# Altium PCB EL-23 PCB.PcbDoc
Units mil, origin at the board's own origin, x right, y up, seen from the top; angles counter-clockwise.
Board outline 1614.17 x 1122.05 mil, 2 copper layers (Top Layer, Bottom Layer); 7 components, 11 nets, 31 pads, 0 vias.
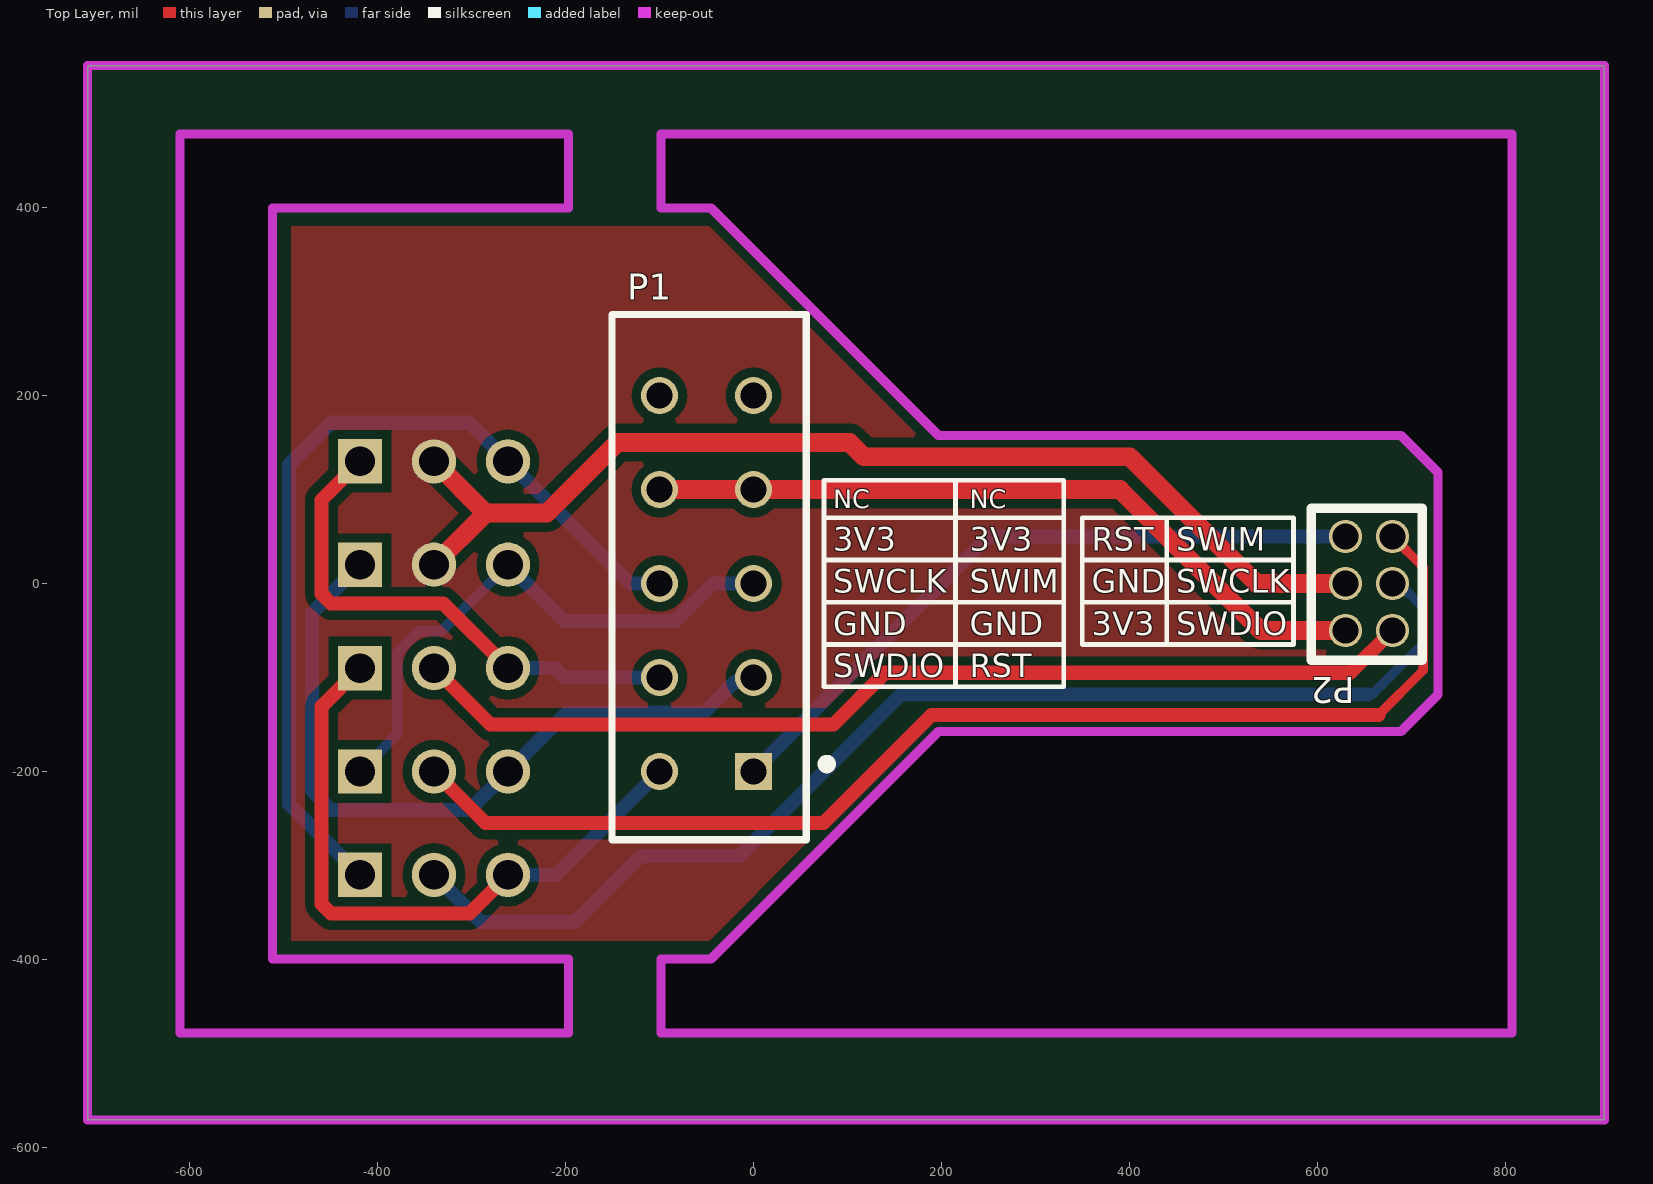
[diagram p0: Top Layer view]
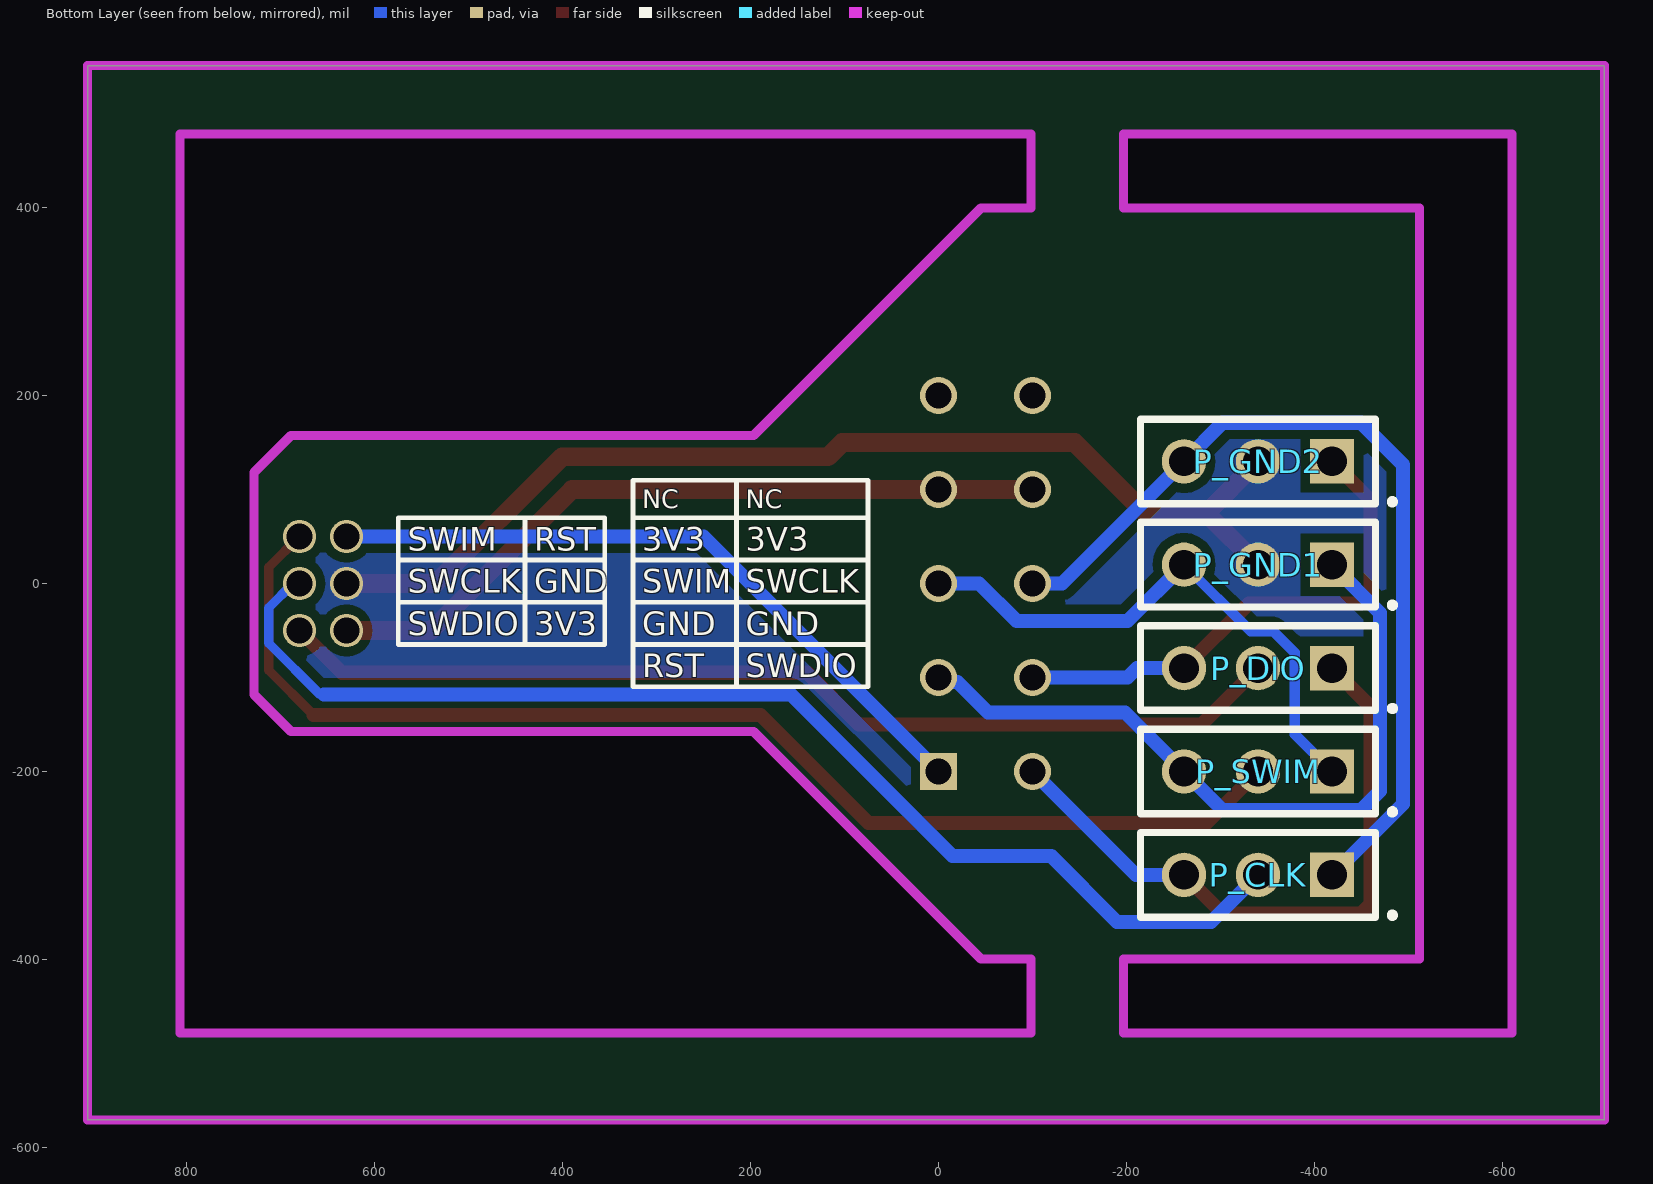
[diagram p1: Bottom Layer view, seen from below]
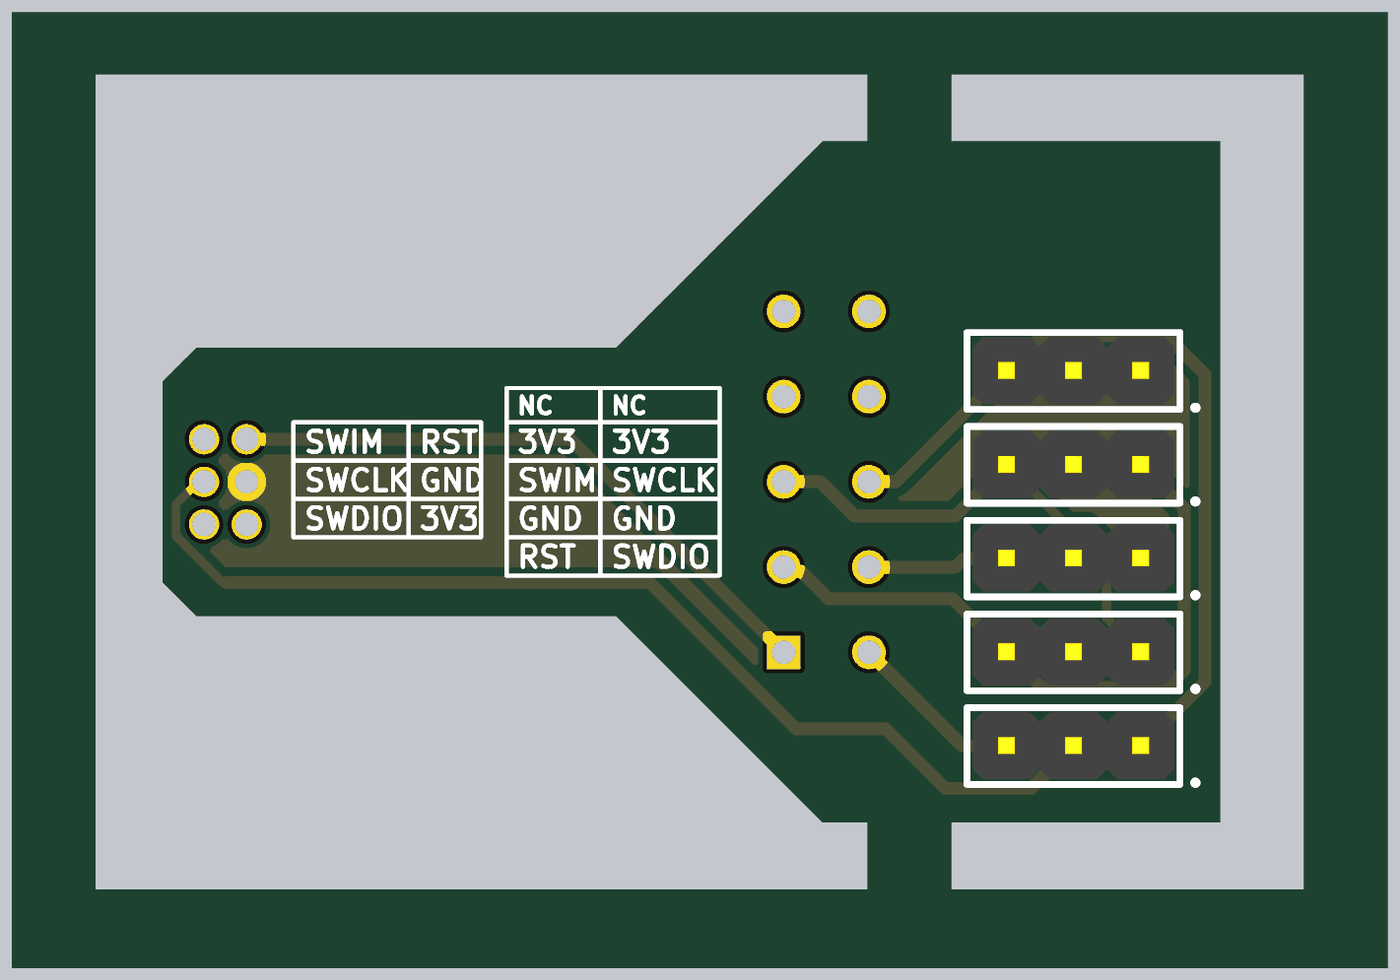
[diagram p2: 3D render of the assembled board from below, using the file's embedded part models]

## Layer stack, top to bottom
Top Solder: solder mask 0.4, Solder Resist, Dk 3.5
Top Layer: signal copper 1.4
Dielectric 1: dielectric 12.6, FR-4, Dk 4.8
Bottom Layer: signal copper 1.4
Bottom Solder: solder mask 0.4, Solder Resist, Dk 3.5

## Board outline
-708.66,-570.87 -708.66,551.18 905.51,551.18 905.51,-570.87
cut-out: -98.43,-399.61 -45.28,-399.61 -39.37,-393.7 196.85,-157.48 688.98,-157.48 728.35,-118.11 728.35,118.11 688.98,157.48 196.85,157.48 -39.37,393.7 -45.28,399.61 -98.43,399.61 -98.43,478.35 807.09,478.35 807.09,-478.35 -98.43,-478.35
cut-out: -610.24,-478.35 -610.24,478.35 -196.85,478.35 -196.85,399.61 -511.81,399.61 -511.81,-399.61 -196.85,-399.61 -196.85,-478.35

## Design rules (kind name [scope] priority, off if disabled: settings)
Clearance [All] p1: gap=10 ignorepadtopadclearanceinfootprint=FALSE except(0: Arc-Hole Track-Hole SMDPad-Hole THPad-Hole Via-Hole Fill-Hole Poly-Hole Region-Hole Text-Hole; 5: Arc-Arc Arc-Track Arc-SMDPad Track-Track Track-SMDPad SMDPad-SMDPad)
ComponentClearance ComponentClearance_1 [IsNetTieComponent] p1: gap=0 collisioncheckmode=3 verticalgap=0 showdistances=FALSE
ComponentClearance [All] p2: gap=10 collisioncheckmode=3 verticalgap=10 showdistances=FALSE
HoleToHoleClearance [All] p1: gap=7 allowstackedmicrovias=TRUE
MinimumSolderMaskSliver [All] p1: minsoldermaskwidth=7
PlaneConnect PlaneConnect_1 [InNet('GND')] p1: pad.planeconnectstyle=Direct pad.reliefexpansion=20 pad.reliefentries=4 pad.reliefconductorwidth=10 pad.reliefairgap=10 via.planeconnectstyle=Relief via.reliefexpansion=20 via.reliefentries=4 via.reliefconductorwidth=10 via.reliefairgap=10
PlaneConnect [All] p2: planeconnectstyle=Relief reliefexpansion=20 reliefentries=4 reliefconductorwidth=10 reliefairgap=10
PolygonConnect PolygonConnect_Via [IsVia] p1: connectstyle=Direct reliefconductorwidth=10 reliefentries=4 polygonreliefangle="90 Angle" airgapwidth=10
PolygonConnect PolygonConnect_MH [HasFootprint('MOUNTING HOLE 2mm') or HasFootprint('MOUNTING HOLE 3mm')] p2: connectstyle=Direct reliefconductorwidth=10 reliefentries=4 polygonreliefangle="90 Angle" airgapwidth=10
PolygonConnect [InNet('GND') vs InNet('GND')] p3: connectstyle=Direct reliefconductorwidth=10 reliefentries=4 polygonreliefangle="90 Angle" airgapwidth=10
RoutingVias [All] p1: holewidth=28 width=50 viastyle="Through Hole" minholewidth=28 minwidth=50 maxholewidth=28 maxwidth=50 useviatemplates=TRUE viatemplateguid#1={307AFF8D-70FF-48B8-A99E-4FD5DD3BA6DC} viatemplateguid#2={7C821D88-889A-4419-B1F3-04276608E0DD} viatemplateguid#3={6377EA1F-44E8-48D8-A7A8-A1AF887AFA51} viatemplateguid#4={D31630F9-C733-4265-A758-78AC21B22467} viatemplatename#1=v71h30m0mx0 viatemplatename#2=v71h30m71 viatemplatename#3=v102h50m0mx0 viatemplatename#4=v127h70
SilkToSilkClearance [All] p1: silktosilkclearance=3
SilkToSolderMaskClearance [IsPad] p1: minsilkscreentomaskgap=7 clearancetoexposedcopper=TRUE
SolderMaskExpansion [All] p1: expansion=5
Width Width_POWER [InNetClass('POWER')] p1: maxlimit=30 minlimit=8 preferedwidth=15
Width [Not InNetClass('POWER')] p2: maxlimit=20 minlimit=8 preferedwidth=10
24 further rules are at their usual default settings.

## Components (designator, comment, footprint, x,y, rotation, side; value= is the part's Value field where it differs from the comment)
P1 "Header 10" SHDRV10W102P254_2X5_2032X895X915P 0,-200 r90 top locked
P2 "Header 6" HEADER_2x3_1_17_WOMAN_THT 679.92,-50 r90 top
P_CLK "Header 3" "HEADER 1x3 2mm" -340,-310 r0 bottom
P_DIO "Header 3" "HEADER 1x3 2mm" -340,-90 r0 bottom
P_GND1 "Header 3" "HEADER 1x3 2mm" -340,20 r0 bottom
P_GND2 "Header 3" "HEADER 1x3 2mm" -340,130 r0 bottom
P_SWIM "Header 3" "HEADER 1x3 2mm" -340,-200 r0 bottom

## Footprints (in the part's own frame and the unit in brackets; to place one, negate y for a bottom-side part, rotate by r counter-clockwise, add the part's x,y. Pads: shape width x height; smd on the part's side, far side on the other; paste and mask are expansions set on the pad)
"HEADER 1x3 2mm" [mm]
  rect 1.2x1.2 hole 0.8: 1(-2,0)
  round 1.2 hole 0.8: 2(0,0) 3(2,0)
  silkscreen extent -3.66,-1.14 3.17,1.14, body extent -3,-2.5 3,0.98, height 6
HEADER_2x3_1_17_WOMAN_THT [mm]
  round 0.9 hole 0.7: 1(0,0) 2(0,1.27) 3(1.27,0) 4(1.27,1.27) 5(2.54,0) 6(2.54,1.27)
  silkscreen extent -0.8,-0.8 3.3,2.2, body extent -0.63,-4.95 3.13,1.4, height 5.6
SHDRV10W102P254_2X5_2032X895X915P [mm]
  rect 1x1 hole 0.7: 1(0,0)
  round 1 hole 0.7: 2(0,2.54) 3(2.54,0) 4(2.54,2.54) 5(5.08,0) 6(5.08,2.54) 7(7.62,0) 8(7.62,2.54) 9(10.16,0) 10(10.16,2.54)
  silkscreen extent -1.85,-2.1 12.35,3.83, body extent -5,-0.25 15.15,13.3, height 12.1

## Part data
P1: "Header, 10-Pin"
P2: "Header, 6-Pin"
P_CLK P_DIO P_GND1 P_GND2 P_SWIM: "Header, 3-Pin"

## Nets (pads, with @x,y where several pads share a name; then routed paths per layer and width w, separated by ;. In a path a pad name is that pad's centre, name@x,y a point inside that pad or via, vN(x,y) a via of type N, cw(c..) or ccw(c..) an arc to the next point about the centre after c; other vN are vias at no path point)
3V3: P1.7 P1.8 P2.2 | length 792.1
  Top Layer w20: P1.8 P1.7 390,100 540,-50 P2.2
GND: P2.4 P_GND1.2 P_GND2.2 | length 1163.7
  Top Layer w20: P_GND1.2 -285,75 ; P_GND2.2 -285,75 ; P2.4 535.37,0 400.37,135 117.5,135 102.5,150 -145,150 -220,75 -285,75
PIN2: P1.2 P_CLK.3 P_DIO.1 | length 694.6
  Top Layer w15: P_DIO.1 -459.86,-131.12 -459.86,-340.87 -449.61,-351.12 -302.38,-351.12 P_CLK.3
  Bottom Layer w15: P_CLK.3 -210,-310 P1.2
PIN3: P1.3 P_GND1.1 P_SWIM.3 | length 798.9
  Bottom Layer w15: P_GND1.1 -470,-31.26 -470,-220.73 -449.61,-241.12 -302.38,-241.12 P_SWIM.3 -198.44,-137.19 -52.59,-137.19 -20.07,-104.66 -4.66,-104.66 P1.3
PIN4: P1.4 P_DIO.3 P_GND2.1 | length 554.7
  Top Layer w15: P_GND2.1 -459.86,88.88 -459.86,-10.87 -449.61,-21.12 -330.14,-21.12 P_DIO.3
  Bottom Layer w15: P_DIO.3 -211.26,-90 -201.26,-100 P1.4
PIN5: P1.5 P_GND1.3 P_SWIM.1 | length 602
  Bottom Layer w11: P_SWIM.1 -379.12,-160.38 -379.12,-73.8 -356.2,-50.88 -332.14,-50.88 P_GND1.3
  Bottom Layer w15: P_GND1.3 -201.26,-40 -83.3,-40 -43.3,0 P1.5
PIN6: P1.6 P_CLK.1 P_GND2.3 | length 951.4
  Bottom Layer w15: P_CLK.1 -494.31,-234.43 -494.31,126.42 -449.61,171.12 -302.38,171.12 P_GND2.3 -131.26,0 P1.6
RST: P1.1 P2.6 | length 733.5
  Bottom Layer w15: P1.1 250,50 P2.6
SWCLK: P2.3 P_CLK.2 | length 1277.3
  Bottom Layer w10: 653.69,-118.11 658.08,-118.11 712.64,-63.55 712.64,-25.83 686.8,0 P2.3
  Bottom Layer w15: P_CLK.2 -290,-360 -190,-360 -120,-290 -15,-290 156.89,-118.11 653.69,-118.11
SWDIO: P2.1 P_DIO.2 | length 1086.2
  Top Layer w15: P_DIO.2 -280,-150 85,-150 140,-95 634.92,-95 P2.1
SWIM: P2.5 P_SWIM.2 | length 1298.7
  Top Layer w10: 665.02,-139.98 712.64,-92.36 712.64,17.28 P2.5
  Top Layer w15: P_SWIM.2 -285,-255 74.58,-255 189.6,-139.98 665.02,-139.98
pads on no net: P1.9 P1.10

## Polygon pours and split planes (outlines as drawn)
GND on Bottom Layer "GND_poly_Bottom" (solid, remove dead copper, pour order 3): -511.81,380 -511.81,-380 -25.67,-380 196.85,-157.48 688.98,-157.48 728.35,-118.11 728.35,118.11 688.98,157.48 196.85,157.48 -25.67,380
GND on Top Layer "GND_poly_Top" (solid, remove dead copper, pour order 5): -492.13,-380 -25.67,-380 196.85,-157.48 688.98,-157.48 728.35,-118.11 728.35,118.11 688.98,157.48 196.85,157.48 -25.67,380 -492.13,380

## Keep-outs
Keep-Out Layer:
  pour cut-out: -610.24,-478.35 -610.24,478.35 -196.85,478.35 -196.85,399.61 -511.81,399.61 -511.81,-399.61 -196.85,-399.61 -196.85,-478.35
  pour cut-out: -196.85,-478.35 -196.85,-399.61 -511.81,-399.61 -511.81,399.61 -196.85,399.61 -196.85,478.35 -610.24,478.35 -610.24,-478.35
  lines w10: -708.66,-570.87 -708.66,551.18 905.51,551.18 905.51,-570.87 -708.66,-570.87 ; -610.24,-478.35 -610.24,478.35 -196.85,478.35 -196.85,399.61 -511.81,399.61 -511.81,-399.61 -196.85,-399.61 -196.85,-478.35 -610.24,-478.35 ; -98.43,-478.35 -98.43,-399.61 -59.06,-399.61 -45.28,-399.61 -39.37,-393.7 196.85,-157.48 688.98,-157.48 728.35,-118.11 728.35,118.11 688.98,157.48 196.85,157.48 -39.37,393.7 -45.28,399.61 -98.43,399.61 -98.43,478.35 807.09,478.35 807.09,-478.35 -98.43,-478.35

## Other copper
Top Layer:
  region net 3V3: 629.92,-50

## Silkscreen, mask and mechanical layers (free items; w line width, h text height)
Top Overlay:
  lines w5: 75,-65 330,-65 ; 75,-20 330,-20 ; 75,25 330,25 ; 75,70 330,70 ; 215,-110 215,110 ; 349.68,-20 574.68,-20 ; 349.68,25 574.68,25 ; 439.68,-65 439.68,70 ; 75,-110 75,110 330,110 330,-110 75,-110 ; 349.68,-65 574.68,-65 574.68,70 349.68,70 349.68,-65
  text "NC" at 85,80 h20
  text "NC" at 230,80 h20
  text "3V3" at 85,35 h25
  text "3V3" at 230,35 h25
  text "RST" at 359.68,35 h25
  text "SWIM" at 449.68,35 h25
  text "SWCLK" at 85,-10 h25
  text "SWIM" at 230,-10 h25
  text "GND" at 359.68,-10 h25
  text "SWCLK" at 449.68,-10 h25
  text "GND" at 85,-55 h25
  text "GND" at 230,-55 h25
  text "3V3" at 359.68,-55 h25
  text "SWDIO" at 449.68,-55 h25
  text "SWDIO" at 85,-100 h25
  text "RST" at 230,-100 h25
Bottom Overlay:
  lines w5: 75,-65 325,-65 ; 75,-20 325,-20 ; 75,25 325,25 ; 75,70 325,70 ; 215,-110 215,110 ; 355,-20 575,-20 ; 355,25 575,25 ; 440,-65 440,70 ; 75,-110 325,-110 325,110 75,110 75,-110 ; 355,-65 575,-65 575,70 355,70 355,-65
  text "NC" at 205,80 h20
  text "NC" at 315,80 h20
  text "3V3" at 205,35 h25
  text "3V3" at 315,35 h25
  text "RST" at 430,35 h25
  text "SWIM" at 565,35 h25
  text "SWCLK" at 205,-10 h25
  text "SWIM" at 315,-10 h25
  text "GND" at 430,-10 h25
  text "SWCLK" at 565,-10 h25
  text "GND" at 205,-55 h25
  text "GND" at 315,-55 h25
  text "3V3" at 430,-55 h25
  text "SWDIO" at 565,-55 h25
  text "SWDIO" at 205,-100 h25
  text "RST" at 315,-100 h25